# EAGLE board test (EAGLE 9.6.1)
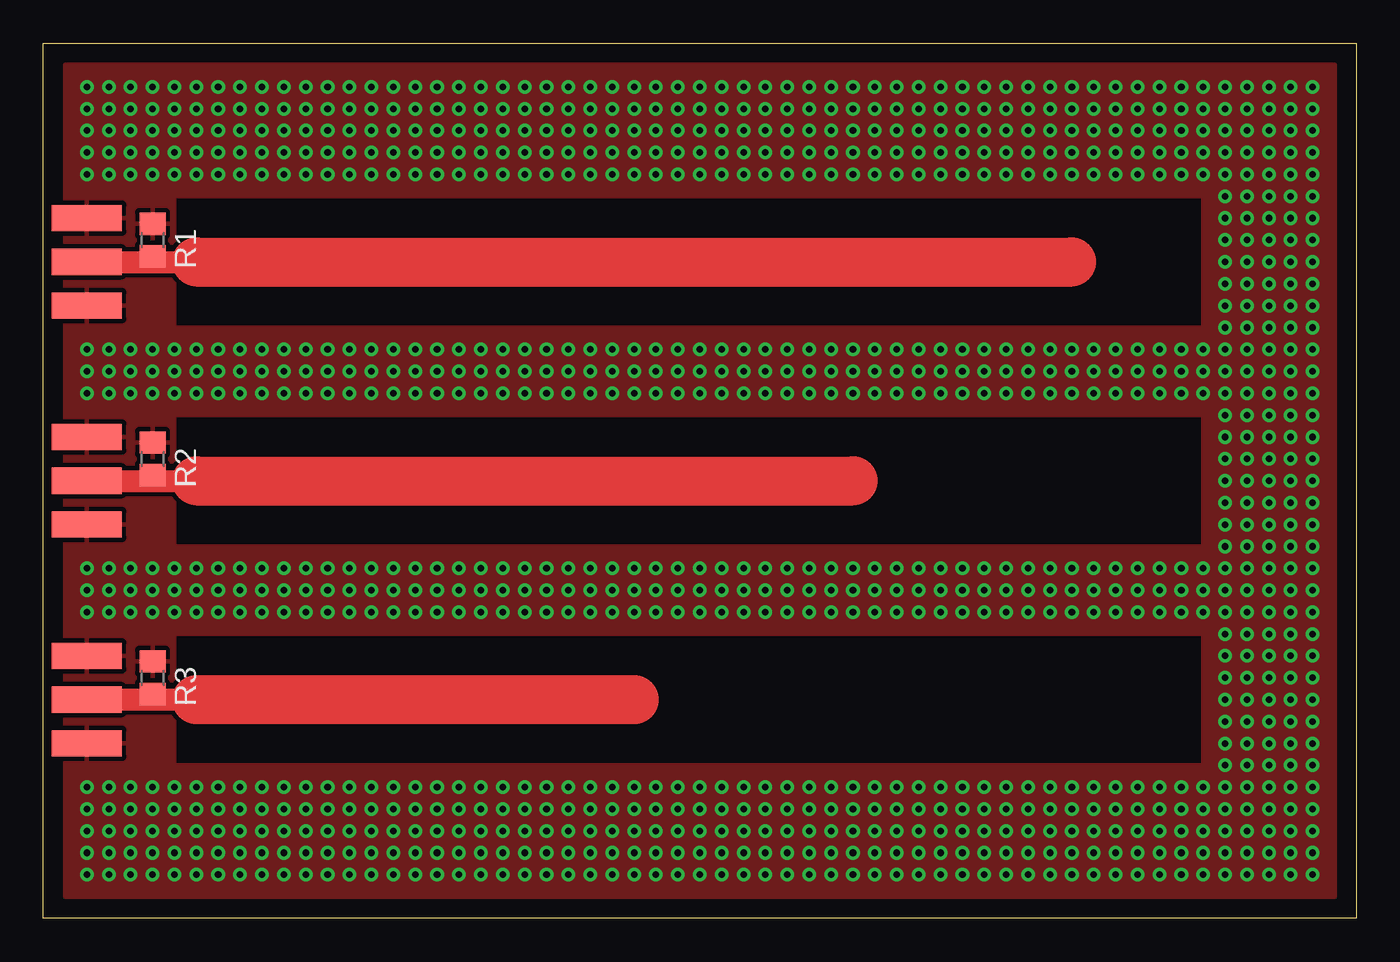
[diagram p0: board, top side]
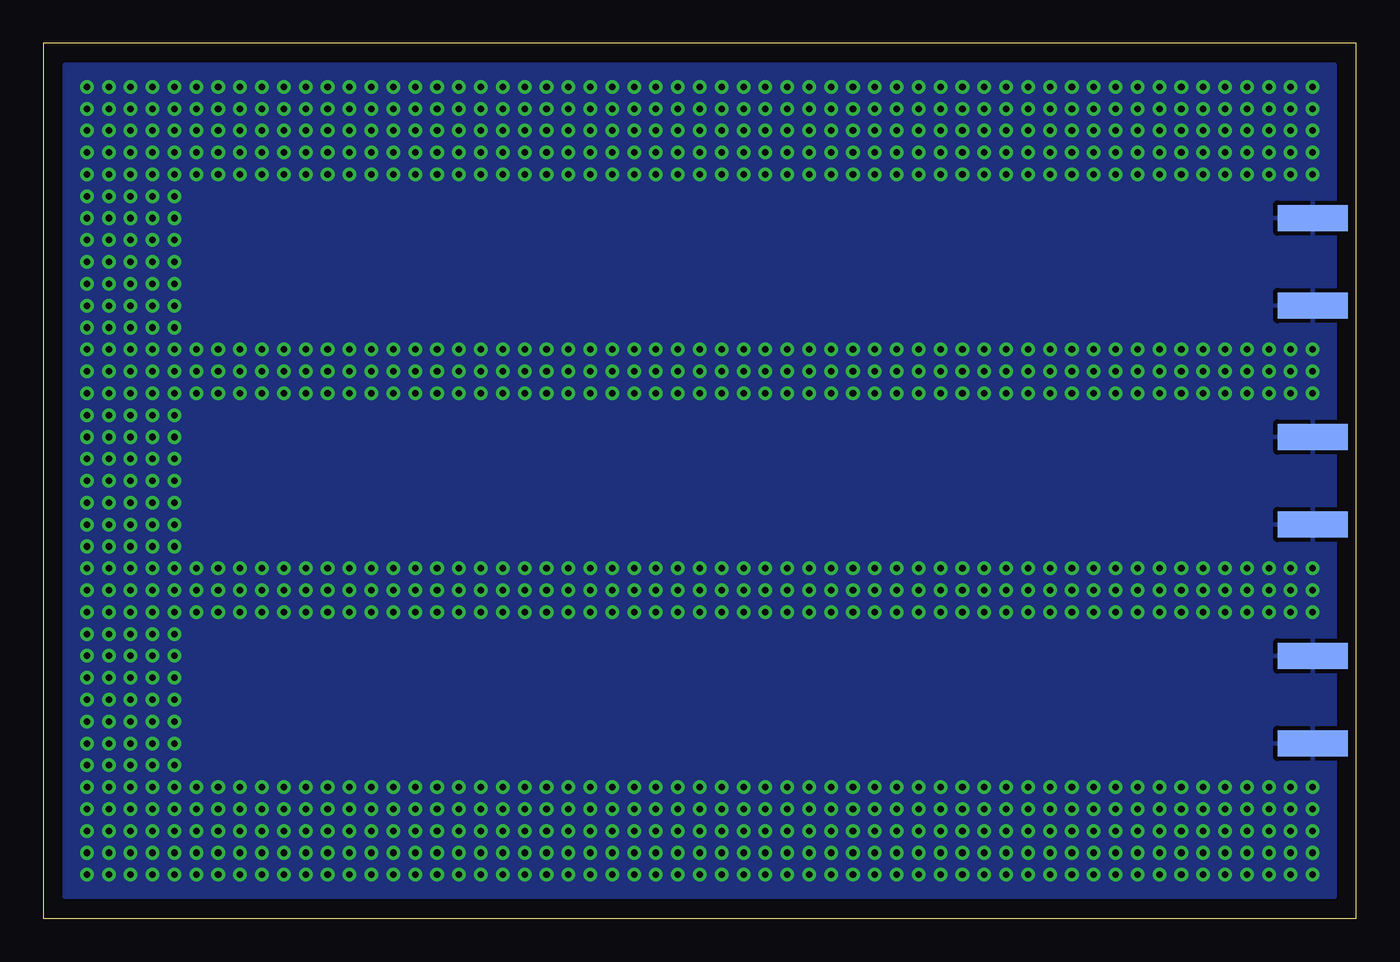
[diagram p1: board, bottom side, seen from below]

Size 76.2 x 50.8 mm. Coordinates in mm from the lower left corner, seen from the top.
Outline: 0,0 0,50.8 76.2,50.8 76.2,0 0,0
Copper layers (1*16): Top 0.035mm / dielectric 0.5mm / Bottom 0.035mm
Design rules "two_layer": minimum track width 5mil, minimum drill 10mil, track to track 5mil, track to pad 5mil, pad to pad 5mil, via to via 5mil, smd to smd 5mil, copper to edge 20mil, drill to drill 8mil, minimum pad ring 10mil, minimum via ring 8mil, stop-mask expansion 4mil, vias tented up to drill 0mil, thermal gap 10mil

## Footprints (pad centres in the part's own frame; a part is rotated, then mirrored left to right if it is on the bottom)
SMA-EDGE = smd 1.524 x 4.064: GND@0 0,0; GND@1 5.08,0; SIG 2.54,0 | smd 1.524 x 4.064 bottom: GND@2 0,0; GND@3 5.08,0
R0805 = smd 1.3 x 1.5: 1 -0.95,0; 2 0.95,0

## Placement (x,y rotation side)
E$1  [SMA-EDGE]  2.54,10.16 90 top
E$2  [SMA-EDGE]  2.54,22.86 90 top
E$4  [SMA-EDGE]  2.54,35.56 90 top
R1  50  [R0805]  6.35,39.37 270 top
R2  50  [R0805]  6.35,26.67 270 top
R3  50  [R0805]  6.35,13.97 270 top

## Library data of the parts
E$1 E$2 E$4 = SparkFun-Retired
R1-R3 = ref-packages

## Nets
1000M: E$1.SIG R3.2
1500M: E$2.SIG R2.2
2000M: E$4.SIG R1.2
GND: E$1.GND@0 E$1.GND@1 E$1.GND@2 E$1.GND@3 E$2.GND@0 E$2.GND@1 E$2.GND@2 E$2.GND@3 E$4.GND@0 E$4.GND@1 E$4.GND@2 E$4.GND@3 R1.1 R2.1 R3.1

## Tracks (layer width: path | path; a pad name or v marks a point on that pad's centre or on a via)
1000M
  Top 1.27: E$1.SIG 6.35,12.7 | 6.35,12.7 8.89,12.7 | R3.2 6.35,12.7
  Top 2.845: 8.89,12.7 34.29,12.7
1500M
  Top 1.27: E$2.SIG 6.35,25.4 | 6.35,25.4 8.89,25.4 | R2.2 6.35,25.4
  Top 2.845: 8.89,25.4 46.99,25.4
2000M
  Top 1.27: E$4.SIG 6.35,38.1 | 6.35,38.1 8.89,38.1 | R1.2 6.35,38.1
  Top 2.845: 8.89,38.1 59.69,38.1
GND  (via drill 0.38)
  other vias: 2.54,48.26 2.54,46.99 2.54,45.72 2.54,44.45 2.54,43.18 3.81,48.26 3.81,46.99 3.81,45.72 3.81,44.45 3.81,43.18 5.08,48.26 5.08,46.99 5.08,45.72 5.08,44.45 5.08,43.18 6.35,48.26 6.35,46.99 6.35,45.72 6.35,44.45 6.35,43.18 7.62,48.26 7.62,46.99 7.62,45.72 7.62,44.45 7.62,43.18 8.89,48.26 8.89,46.99 8.89,45.72 8.89,44.45 8.89,43.18 10.16,48.26 10.16,46.99 10.16,45.72 10.16,44.45 10.16,43.18 11.43,48.26 11.43,46.99 11.43,45.72 11.43,44.45 11.43,43.18 12.7,48.26 12.7,46.99 12.7,45.72 12.7,44.45 12.7,43.18 13.97,48.26 13.97,46.99 13.97,45.72 13.97,44.45 13.97,43.18 15.24,48.26 15.24,46.99 15.24,45.72 15.24,44.45 15.24,43.18 16.51,48.26 16.51,46.99 16.51,45.72 16.51,44.45 16.51,43.18 17.78,48.26 17.78,46.99 17.78,45.72 17.78,44.45 17.78,43.18 19.05,48.26 19.05,46.99 19.05,45.72 19.05,44.45 19.05,43.18 20.32,48.26 20.32,46.99 20.32,45.72 20.32,44.45 20.32,43.18 21.59,48.26 21.59,46.99 21.59,45.72 21.59,44.45 21.59,43.18 22.86,48.26 22.86,46.99 22.86,45.72 22.86,44.45 22.86,43.18 24.13,48.26 24.13,46.99 24.13,45.72 24.13,44.45 24.13,43.18 25.4,48.26 25.4,46.99 25.4,45.72 25.4,44.45 25.4,43.18 26.67,48.26 26.67,46.99 26.67,45.72 26.67,44.45 26.67,43.18 27.94,48.26 27.94,46.99 27.94,45.72 27.94,44.45 27.94,43.18 29.21,48.26 29.21,46.99 29.21,45.72 29.21,44.45 29.21,43.18 30.48,48.26 30.48,46.99 30.48,45.72 30.48,44.45 30.48,43.18 31.75,48.26 31.75,46.99 31.75,45.72 31.75,44.45 31.75,43.18 33.02,48.26 33.02,46.99 33.02,45.72 33.02,44.45 33.02,43.18 34.29,48.26 34.29,46.99 34.29,45.72 34.29,44.45 34.29,43.18 35.56,48.26 35.56,46.99 35.56,45.72 35.56,44.45 35.56,43.18 36.83,48.26 36.83,46.99 36.83,45.72 36.83,44.45 36.83,43.18 38.1,48.26 38.1,46.99 38.1,45.72 38.1,44.45 38.1,43.18 39.37,48.26 39.37,46.99 39.37,45.72 39.37,44.45 39.37,43.18 40.64,48.26 40.64,46.99 40.64,45.72 40.64,44.45 40.64,43.18 41.91,48.26 41.91,46.99 41.91,45.72 41.91,44.45 41.91,43.18 43.18,48.26 43.18,46.99 43.18,45.72 43.18,44.45 43.18,43.18 44.45,48.26 44.45,46.99 44.45,45.72 44.45,44.45 44.45,43.18 45.72,48.26 45.72,46.99 45.72,45.72 45.72,44.45 45.72,43.18 46.99,48.26 46.99,46.99 46.99,45.72 46.99,44.45 46.99,43.18 48.26,48.26 48.26,46.99 48.26,45.72 48.26,44.45 48.26,43.18 49.53,48.26 49.53,46.99 49.53,45.72 49.53,44.45 49.53,43.18 50.8,48.26 50.8,46.99 50.8,45.72 50.8,44.45 50.8,43.18 52.07,48.26 52.07,46.99 52.07,45.72 52.07,44.45 52.07,43.18 53.34,48.26 53.34,46.99 53.34,45.72 53.34,44.45 53.34,43.18 54.61,48.26 54.61,46.99 54.61,45.72 54.61,44.45 54.61,43.18 55.88,48.26 55.88,46.99 55.88,45.72 55.88,44.45 55.88,43.18 57.15,48.26 57.15,46.99 57.15,45.72 57.15,44.45 57.15,43.18 58.42,48.26 58.42,46.99 58.42,45.72 58.42,44.45 58.42,43.18 59.69,48.26 59.69,46.99 59.69,45.72 59.69,44.45 59.69,43.18 60.96,48.26 60.96,46.99 60.96,45.72 60.96,44.45 60.96,43.18 62.23,48.26 62.23,46.99 62.23,45.72 62.23,44.45 62.23,43.18 63.5,48.26 63.5,46.99 63.5,45.72 63.5,44.45 63.5,43.18 64.77,48.26 64.77,46.99 64.77,45.72 64.77,44.45 64.77,43.18 66.04,48.26 66.04,46.99 66.04,45.72 66.04,44.45 66.04,43.18 67.31,48.26 67.31,46.99 67.31,45.72 67.31,44.45 67.31,43.18 68.58,48.26 68.58,46.99 68.58,45.72 68.58,44.45 68.58,43.18 69.85,48.26 69.85,46.99 69.85,45.72 69.85,44.45 69.85,43.18 71.12,48.26 71.12,46.99 71.12,45.72 71.12,44.45 71.12,43.18 72.39,48.26 72.39,46.99 72.39,45.72 72.39,44.45 72.39,43.18 73.66,48.26 73.66,46.99 73.66,45.72 73.66,44.45 73.66,43.18 2.54,33.02 2.54,31.75 2.54,30.48 3.81,33.02 3.81,31.75 3.81,30.48 5.08,33.02 5.08,31.75 5.08,30.48 6.35,33.02 6.35,31.75 6.35,30.48 7.62,33.02 7.62,31.75 7.62,30.48 8.89,33.02 8.89,31.75 8.89,30.48 10.16,33.02 10.16,31.75 10.16,30.48 11.43,33.02 11.43,31.75 11.43,30.48 12.7,33.02 12.7,31.75 12.7,30.48 13.97,33.02 13.97,31.75 13.97,30.48 15.24,33.02 15.24,31.75 15.24,30.48 16.51,33.02 16.51,31.75 16.51,30.48 17.78,33.02 17.78,31.75 17.78,30.48 19.05,33.02 19.05,31.75 19.05,30.48 20.32,33.02 20.32,31.75 20.32,30.48 21.59,33.02 21.59,31.75 21.59,30.48 22.86,33.02 22.86,31.75 22.86,30.48 24.13,33.02 24.13,31.75 24.13,30.48 25.4,33.02 25.4,31.75 25.4,30.48 26.67,33.02 26.67,31.75 26.67,30.48 27.94,33.02 27.94,31.75 27.94,30.48 29.21,33.02 29.21,31.75 29.21,30.48 30.48,33.02 30.48,31.75 30.48,30.48 31.75,33.02 31.75,31.75 31.75,30.48 33.02,33.02 33.02,31.75 33.02,30.48 34.29,33.02 34.29,31.75 34.29,30.48 35.56,33.02 35.56,31.75 35.56,30.48 36.83,33.02 36.83,31.75 36.83,30.48 38.1,33.02 38.1,31.75 38.1,30.48 39.37,33.02 39.37,31.75 39.37,30.48 40.64,33.02 40.64,31.75 40.64,30.48 41.91,33.02 41.91,31.75 41.91,30.48 43.18,33.02 43.18,31.75 43.18,30.48 44.45,33.02 44.45,31.75 44.45,30.48 45.72,33.02 45.72,31.75 45.72,30.48 46.99,33.02 46.99,31.75 46.99,30.48 48.26,33.02 48.26,31.75 48.26,30.48 49.53,33.02 49.53,31.75 49.53,30.48 50.8,33.02 50.8,31.75 50.8,30.48 52.07,33.02 52.07,31.75 52.07,30.48 53.34,33.02 53.34,31.75 53.34,30.48 54.61,33.02 54.61,31.75 54.61,30.48 55.88,33.02 55.88,31.75 55.88,30.48 57.15,33.02 57.15,31.75 57.15,30.48 58.42,33.02 58.42,31.75 58.42,30.48 59.69,33.02 59.69,31.75 59.69,30.48 60.96,33.02 60.96,31.75 60.96,30.48 62.23,33.02 62.23,31.75 62.23,30.48 63.5,33.02 63.5,31.75 63.5,30.48 64.77,33.02 64.77,31.75 64.77,30.48 66.04,33.02 66.04,31.75 66.04,30.48 67.31,33.02 67.31,31.75 67.31,30.48 68.58,33.02 68.58,31.75 68.58,30.48 69.85,33.02 69.85,31.75 69.85,30.48 71.12,33.02 71.12,31.75 71.12,30.48 72.39,33.02 72.39,31.75 72.39,30.48 73.66,33.02 73.66,31.75 73.66,30.48 2.54,20.32 2.54,19.05 2.54,17.78 3.81,20.32 3.81,19.05 3.81,17.78 5.08,20.32 5.08,19.05 5.08,17.78 6.35,20.32 6.35,19.05 6.35,17.78 7.62,20.32 7.62,19.05 7.62,17.78 8.89,20.32 8.89,19.05 8.89,17.78 10.16,20.32 10.16,19.05 10.16,17.78 11.43,20.32 11.43,19.05 11.43,17.78 12.7,20.32 12.7,19.05 12.7,17.78 13.97,20.32 13.97,19.05 13.97,17.78 15.24,20.32 15.24,19.05 15.24,17.78 16.51,20.32 16.51,19.05 16.51,17.78 17.78,20.32 17.78,19.05 17.78,17.78 19.05,20.32 19.05,19.05 19.05,17.78 20.32,20.32 20.32,19.05 20.32,17.78 21.59,20.32 21.59,19.05 21.59,17.78 22.86,20.32 22.86,19.05 22.86,17.78 24.13,20.32 24.13,19.05 24.13,17.78 25.4,20.32 25.4,19.05 25.4,17.78 26.67,20.32 26.67,19.05 26.67,17.78 27.94,20.32 27.94,19.05 27.94,17.78 29.21,20.32 29.21,19.05 29.21,17.78 30.48,20.32 30.48,19.05 30.48,17.78 31.75,20.32 31.75,19.05 31.75,17.78 33.02,20.32 33.02,19.05 33.02,17.78 34.29,20.32 34.29,19.05 34.29,17.78 35.56,20.32 35.56,19.05 35.56,17.78 36.83,20.32 36.83,19.05 36.83,17.78 38.1,20.32 38.1,19.05 38.1,17.78 39.37,20.32 39.37,19.05 39.37,17.78 40.64,20.32 40.64,19.05 40.64,17.78 41.91,20.32 41.91,19.05 41.91,17.78 43.18,20.32 43.18,19.05 43.18,17.78 44.45,20.32 44.45,19.05 44.45,17.78 45.72,20.32 45.72,19.05 45.72,17.78 46.99,20.32 46.99,19.05 46.99,17.78 48.26,20.32 48.26,19.05 48.26,17.78 49.53,20.32 49.53,19.05 49.53,17.78 50.8,20.32 50.8,19.05 50.8,17.78 52.07,20.32 52.07,19.05 52.07,17.78 53.34,20.32 53.34,19.05 53.34,17.78 54.61,20.32 54.61,19.05 54.61,17.78 55.88,20.32 55.88,19.05 55.88,17.78 57.15,20.32 57.15,19.05 57.15,17.78 58.42,20.32 58.42,19.05 58.42,17.78 59.69,20.32 59.69,19.05 59.69,17.78 60.96,20.32 60.96,19.05 60.96,17.78 62.23,20.32 62.23,19.05 62.23,17.78 63.5,20.32 63.5,19.05 63.5,17.78 64.77,20.32 64.77,19.05 64.77,17.78 66.04,20.32 66.04,19.05 66.04,17.78 67.31,20.32 67.31,19.05 67.31,17.78 68.58,20.32 68.58,19.05 68.58,17.78 69.85,20.32 69.85,19.05 69.85,17.78 71.12,20.32 71.12,19.05 71.12,17.78 72.39,20.32 72.39,19.05 72.39,17.78 73.66,20.32 73.66,19.05 73.66,17.78 2.54,7.62 2.54,6.35 2.54,5.08 2.54,3.81 2.54,2.54 3.81,7.62 3.81,6.35 3.81,5.08 3.81,3.81 3.81,2.54 5.08,7.62 5.08,6.35 5.08,5.08 5.08,3.81 5.08,2.54 6.35,7.62 6.35,6.35 6.35,5.08 6.35,3.81 6.35,2.54 7.62,7.62 7.62,6.35 7.62,5.08 7.62,3.81 7.62,2.54 8.89,7.62 8.89,6.35 8.89,5.08 8.89,3.81 8.89,2.54 10.16,7.62 10.16,6.35 10.16,5.08 10.16,3.81 10.16,2.54 11.43,7.62 11.43,6.35 11.43,5.08 11.43,3.81 11.43,2.54 12.7,7.62 12.7,6.35 12.7,5.08 12.7,3.81 12.7,2.54 13.97,7.62 13.97,6.35 13.97,5.08 13.97,3.81 13.97,2.54 15.24,7.62 15.24,6.35 15.24,5.08 15.24,3.81 15.24,2.54 16.51,7.62 16.51,6.35 16.51,5.08 16.51,3.81 16.51,2.54 17.78,7.62 17.78,6.35 17.78,5.08 17.78,3.81 17.78,2.54 19.05,7.62 19.05,6.35 19.05,5.08 19.05,3.81 19.05,2.54 20.32,7.62 20.32,6.35 20.32,5.08 20.32,3.81 20.32,2.54 21.59,7.62 21.59,6.35 21.59,5.08 21.59,3.81 21.59,2.54 22.86,7.62 22.86,6.35 22.86,5.08 22.86,3.81 22.86,2.54 24.13,7.62 24.13,6.35 24.13,5.08 24.13,3.81 24.13,2.54 25.4,7.62 25.4,6.35 25.4,5.08 25.4,3.81 25.4,2.54 26.67,7.62 26.67,6.35 26.67,5.08 26.67,3.81 26.67,2.54 27.94,7.62 27.94,6.35 27.94,5.08 27.94,3.81 27.94,2.54 29.21,7.62 29.21,6.35 29.21,5.08 29.21,3.81 29.21,2.54 30.48,7.62 30.48,6.35 30.48,5.08 30.48,3.81 30.48,2.54 31.75,7.62 31.75,6.35 31.75,5.08 31.75,3.81 31.75,2.54 33.02,7.62 33.02,6.35 33.02,5.08 33.02,3.81 33.02,2.54 34.29,7.62 34.29,6.35 34.29,5.08 34.29,3.81 34.29,2.54 35.56,7.62 35.56,6.35 35.56,5.08 35.56,3.81 35.56,2.54 36.83,7.62 36.83,6.35 36.83,5.08 36.83,3.81 36.83,2.54 38.1,7.62 38.1,6.35 38.1,5.08 38.1,3.81 38.1,2.54 39.37,7.62 39.37,6.35 39.37,5.08 39.37,3.81 39.37,2.54 40.64,7.62 40.64,6.35 40.64,5.08 40.64,3.81 40.64,2.54 41.91,7.62 41.91,6.35 41.91,5.08 41.91,3.81 41.91,2.54 43.18,7.62 43.18,6.35 43.18,5.08 43.18,3.81 43.18,2.54 44.45,7.62 44.45,6.35 44.45,5.08 44.45,3.81 44.45,2.54 45.72,7.62 45.72,6.35 45.72,5.08 45.72,3.81 45.72,2.54 46.99,7.62 46.99,6.35 46.99,5.08 46.99,3.81 46.99,2.54 48.26,7.62 48.26,6.35 48.26,5.08 48.26,3.81 48.26,2.54 49.53,7.62 49.53,6.35 49.53,5.08 49.53,3.81 49.53,2.54 50.8,7.62 50.8,6.35 50.8,5.08 50.8,3.81 50.8,2.54 52.07,7.62 52.07,6.35 52.07,5.08 52.07,3.81 52.07,2.54 53.34,7.62 53.34,6.35 53.34,5.08 53.34,3.81 53.34,2.54 54.61,7.62 54.61,6.35 54.61,5.08 54.61,3.81 54.61,2.54 55.88,7.62 55.88,6.35 55.88,5.08 55.88,3.81 55.88,2.54 57.15,7.62 57.15,6.35 57.15,5.08 57.15,3.81 57.15,2.54 58.42,7.62 58.42,6.35 58.42,5.08 58.42,3.81 58.42,2.54 59.69,7.62 59.69,6.35 59.69,5.08 59.69,3.81 59.69,2.54 60.96,7.62 60.96,6.35 60.96,5.08 60.96,3.81 60.96,2.54 62.23,7.62 62.23,6.35 62.23,5.08 62.23,3.81 62.23,2.54 63.5,7.62 63.5,6.35 63.5,5.08 63.5,3.81 63.5,2.54 64.77,7.62 64.77,6.35 64.77,5.08 64.77,3.81 64.77,2.54 66.04,7.62 66.04,6.35 66.04,5.08 66.04,3.81 66.04,2.54 67.31,7.62 67.31,6.35 67.31,5.08 67.31,3.81 67.31,2.54 68.58,7.62 68.58,6.35 68.58,5.08 68.58,3.81 68.58,2.54 69.85,7.62 69.85,6.35 69.85,5.08 69.85,3.81 69.85,2.54 71.12,7.62 71.12,6.35 71.12,5.08 71.12,3.81 71.12,2.54 72.39,7.62 72.39,6.35 72.39,5.08 72.39,3.81 72.39,2.54 73.66,7.62 73.66,6.35 73.66,5.08 73.66,3.81 73.66,2.54 68.58,41.91 68.58,40.64 68.58,39.37 68.58,38.1 68.58,36.83 69.85,41.91 69.85,40.64 69.85,39.37 69.85,38.1 69.85,36.83 71.12,41.91 71.12,40.64 71.12,39.37 71.12,38.1 71.12,36.83 72.39,41.91 72.39,40.64 72.39,39.37 72.39,38.1 72.39,36.83 73.66,41.91 73.66,40.64 73.66,39.37 73.66,38.1 73.66,36.83 68.58,29.21 68.58,27.94 68.58,26.67 68.58,25.4 68.58,24.13 69.85,29.21 69.85,27.94 69.85,26.67 69.85,25.4 69.85,24.13 71.12,29.21 71.12,27.94 71.12,26.67 71.12,25.4 71.12,24.13 72.39,29.21 72.39,27.94 72.39,26.67 72.39,25.4 72.39,24.13 73.66,29.21 73.66,27.94 73.66,26.67 73.66,25.4 73.66,24.13 68.58,16.51 68.58,15.24 68.58,13.97 68.58,12.7 68.58,11.43 69.85,16.51 69.85,15.24 69.85,13.97 69.85,12.7 69.85,11.43 71.12,16.51 71.12,15.24 71.12,13.97 71.12,12.7 71.12,11.43 72.39,16.51 72.39,15.24 72.39,13.97 72.39,12.7 72.39,11.43 73.66,16.51 73.66,15.24 73.66,13.97 73.66,12.7 73.66,11.43 68.58,22.86 68.58,21.59 69.85,22.86 69.85,21.59 71.12,22.86 71.12,21.59 72.39,22.86 72.39,21.59 73.66,22.86 73.66,21.59 68.58,35.56 68.58,34.29 69.85,35.56 69.85,34.29 71.12,35.56 71.12,34.29 72.39,35.56 72.39,34.29 73.66,35.56 73.66,34.29 68.58,10.16 68.58,8.89 69.85,10.16 69.85,8.89 71.12,10.16 71.12,8.89 72.39,10.16 72.39,8.89 73.66,10.16 73.66,8.89
  pour Bottom (isolate 0.254): 1.27,49.53 74.93,49.53 74.93,1.27 1.27,1.27
  pour Top (isolate 0.254): 1.27,49.53 74.93,49.53 74.93,41.91 7.62,41.91 7.62,34.29 74.93,34.29 74.93,29.21 7.62,29.21 7.62,21.59 74.93,21.59 74.93,16.51 7.62,16.51 7.62,8.89 74.93,8.89 74.93,1.27 1.27,1.27
  pour Top (isolate 0.254): 67.31,49.53 67.31,1.27 74.93,1.27 74.93,49.53